# Altium PCB Board1.PcbDoc
Units mm, origin at the board's own origin, x right, y up, seen from the top; angles counter-clockwise.
Board outline 72.77 x 57.02 mm, 2 copper layers (Top Layer, Bottom Layer); 33 components, 27 nets, 112 pads, 9 vias.
Unrouted connection lines stored in the file: 1.
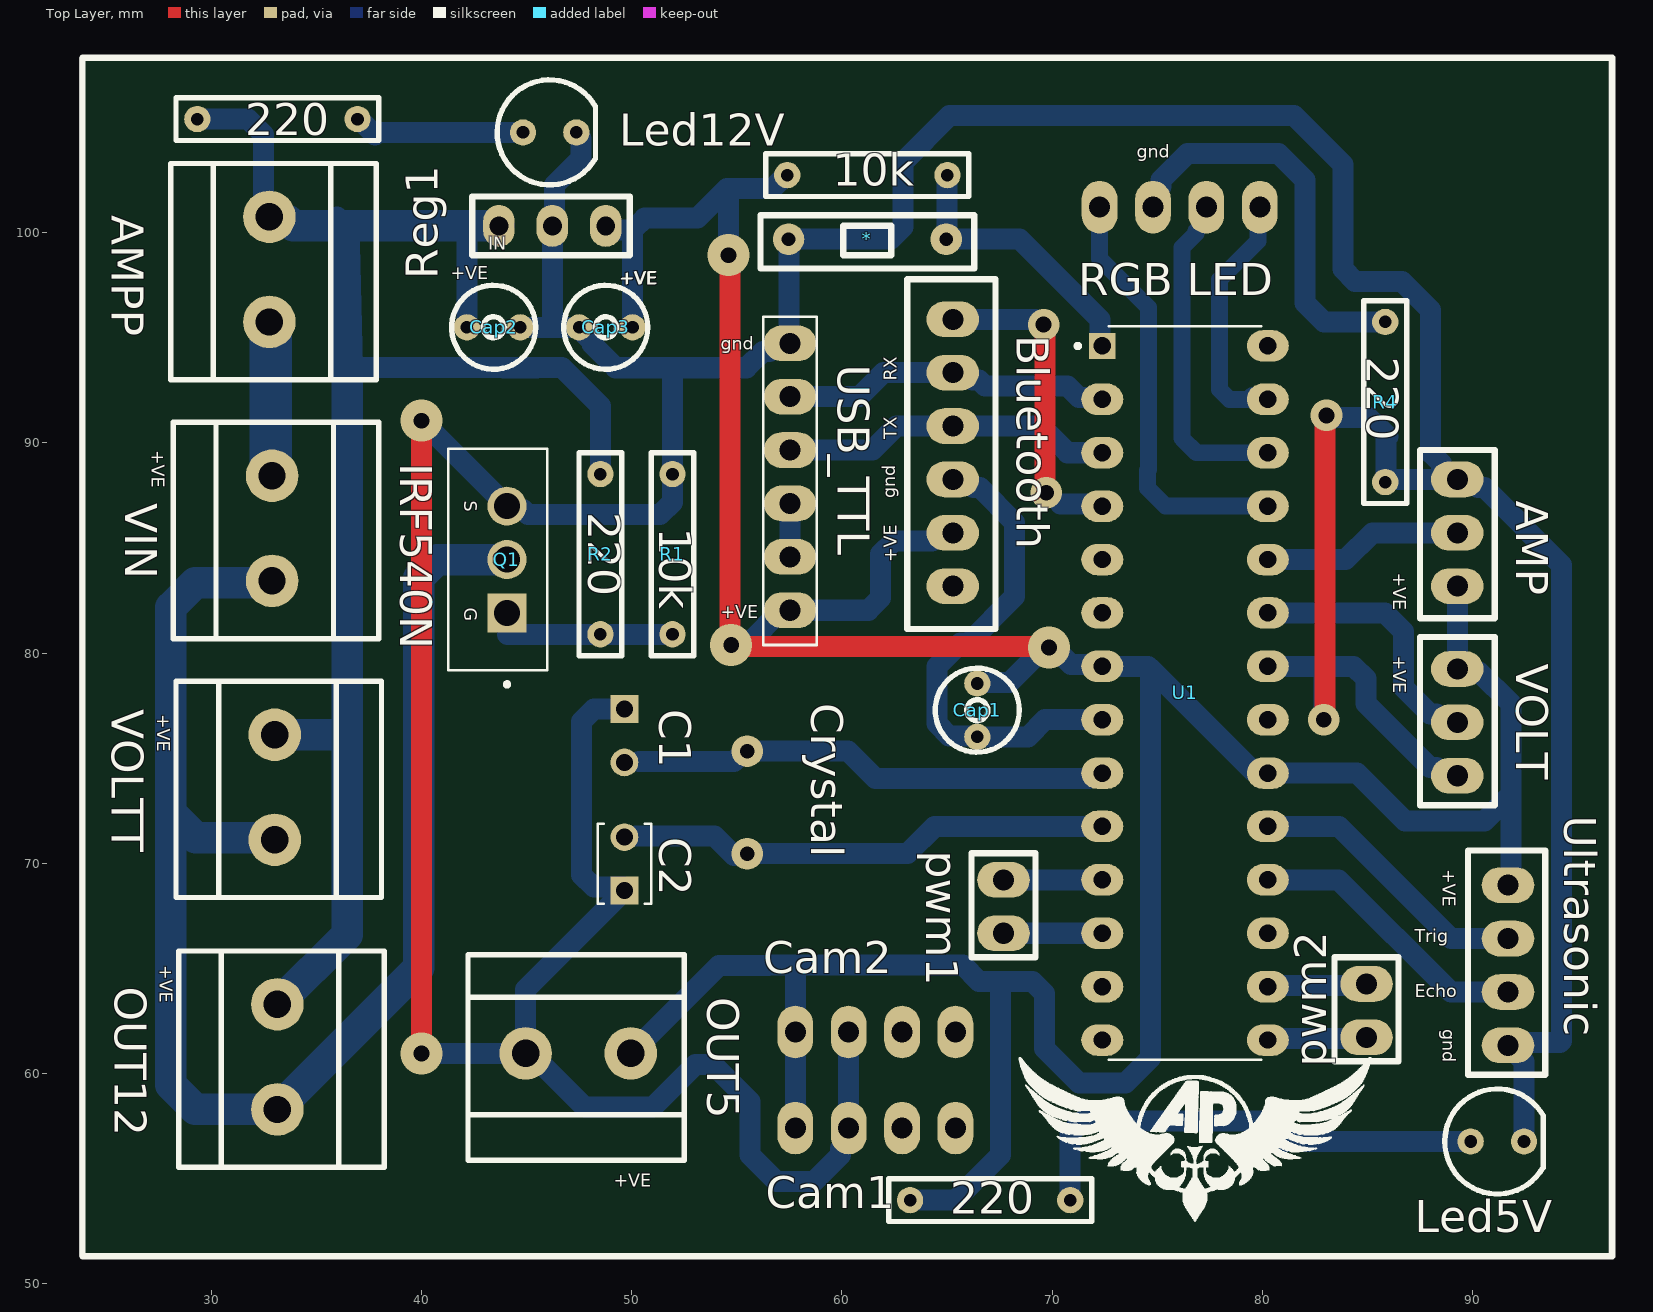
[diagram p0: Top Layer view]
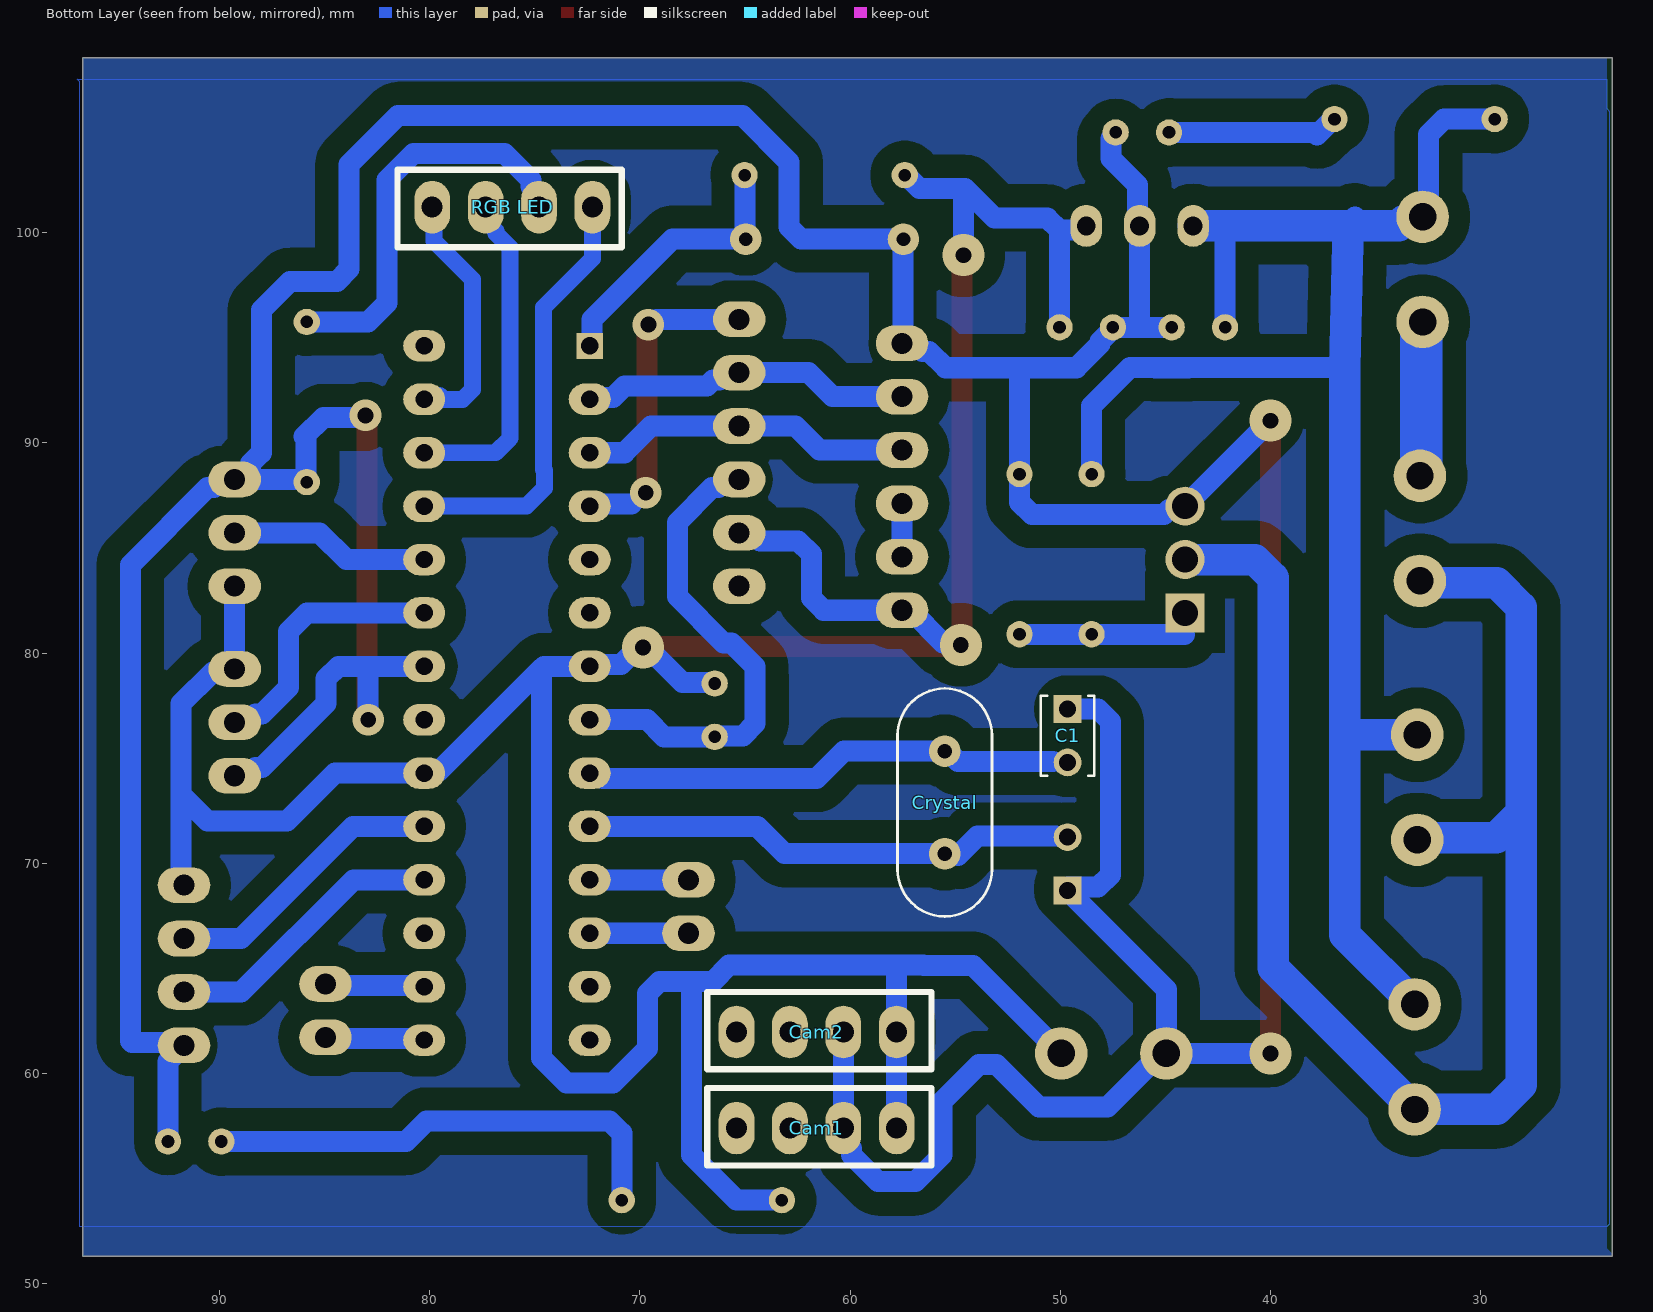
[diagram p1: Bottom Layer view, seen from below]
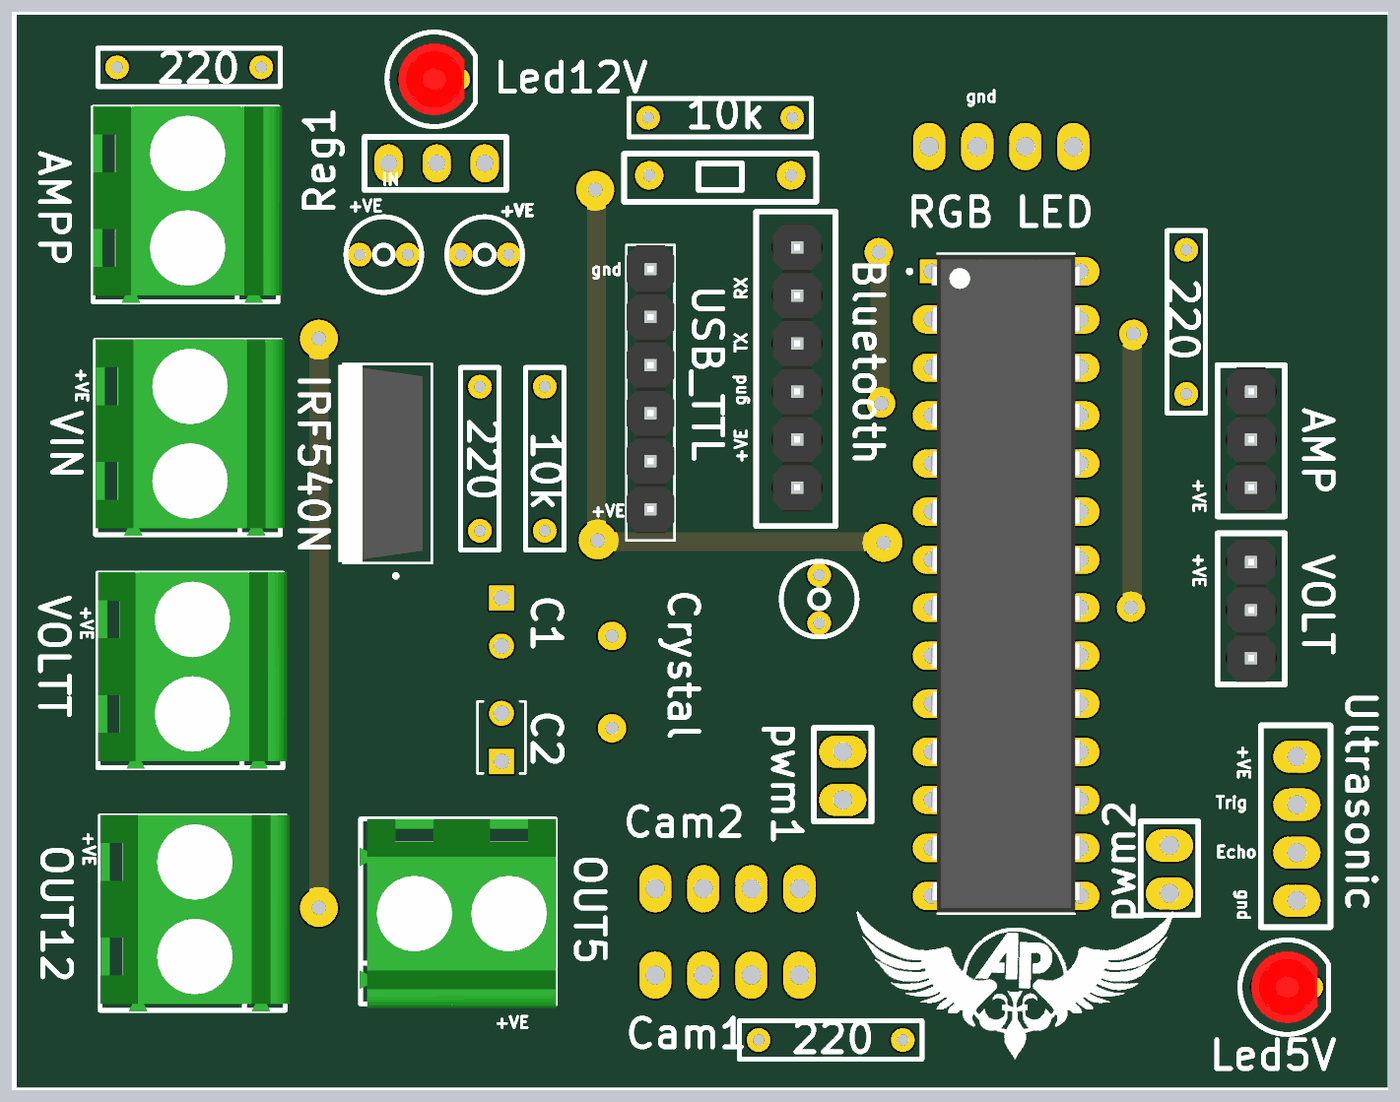
[diagram p2: 3D render of the assembled board from above, using the file's embedded part models]

## Layer stack, top to bottom
Top Solder: solder mask 0.0102, Solder Resist, Dk 3.5
Top Layer: signal copper 0.0356
Dielectric 1: dielectric 0.32, FR-4, Dk 4.8
Bottom Layer: signal copper 0.0356
Bottom Solder: solder mask 0.0102, Solder Resist, Dk 3.5

## Board outline
23.749,51.308 96.52,51.308 96.52,108.331 23.749,108.331

## Design rules (kind name [scope] priority, off if disabled: settings)
Clearance [All] p1: gap=0.8 ignorepadtopadclearanceinfootprint=FALSE except(1: THPad-Poly Via-Poly; 1.1: Track-Poly)
PlaneClearance [All] p1: clearance=0.504
PolygonConnect [All] p1: connectstyle=Relief reliefconductorwidth=0.254 reliefentries=4 polygonreliefangle="90 Angle" airgapwidth=0.254
RoutingVias [All] p1: holewidth=0.711 width=1.27 viastyle="Through Hole" minholewidth=0.711 minwidth=1.27 maxholewidth=0.711 maxwidth=1.27
SolderMaskExpansion [All] p1: expansion=0.102 istentingtop=FALSE
Width [All] p1: maxlimit=2 minlimit=0.8 preferedwidth=1
29 further rules are at their usual default settings.

## Components (designator, comment, footprint, x,y, rotation, side; value= is the part's Value field where it differs from the comment)
10k "Resistor" Resistor 61.214,102.743 r180 top
220 "220" Resistor 67.056,53.975 r180 top (schematic designator R5)
220 "220" Resistor 33.147,105.41 r180 top (schematic designator R3)
* "dipswitch" dipswitch 61.214,99.695 r0 top
AMP "Header 1x3" "pinheaders 3 pins" 89.281,88.265 r90 top
AMPP "Terminal Block" "Terminal Block" 32.766,100.758 r270 top
Bluetooth "Header 1x6" "pinheaders 6 pins" 65.278,88.265 r90 top (schematic designator USB_TTL?)
C1 "ceramic" "ceramic cap" 49.657,76.073 r270 bottom
C2 "ceramic" "ceramic cap" 49.657,69.977 r90 top
Cam1 "Header 1x4" "pinheaders 4 pins" 60.325,57.404 r180 bottom
Cam2 "2" "pinheaders 4 pins" 60.325,61.976 r180 bottom
Cap1 "Capacitor" Capacitor 66.445,77.288 r270 top
Cap2 "Capacitor" Capacitor 43.434,95.504 r0 top
Cap3 "Capacitor" Capacitor 48.768,95.504 r180 top
Crystal "Crystal" crystal 55.499,72.898 r270 bottom
Led5V "Led 5mm" LED 91.186,56.769 r0 top (schematic designator Led2)
Led12V "Led 5mm" LED 46.101,104.775 r0 top (schematic designator Led1)
OUT5 "Terminal Block" "Terminal Block" 49.958,60.96 r180 top
OUT12 "Terminal Block" "Terminal Block" 33.147,63.293 r270 top
pwm1 "Header 2x1" "pinheaders 2 pins" 67.691,69.215 r270 top (schematic designator PWM1)
pwm2 "Header 2x1" "pinheaders 2 pins" 84.963,64.262 r270 top (schematic designator PWM2)
Q1 "IRF540N" irf540n 44.069,81.915 r90 top
R1 "10k" Resistor 51.943,84.709 r90 top
R2 "220" Resistor 48.514,84.709 r270 top
R4 "220" Resistor 85.852,91.948 r90 top
Reg1 "Regulator" Regulator 46.228,100.33 r0 top
"RGB LED" "Header 1x4" "pinheaders 4 pins" 77.343,101.219 r0 bottom
U1 "ATMEGA328-PU" ATMEGA328PU 76.327,78.105 r0 top
Ultrasonic "Header 1x4" "pinheaders 4 pins" 91.694,66.421 r90 top
USB_TTL "Header 1x6" "pinheaders 6 pins" 57.531,87.122 r90 top
VIN "Terminal Block" "Terminal Block" 32.893,88.439 r270 top
VOLT "Header 1x3" "pinheaders 3 pins" 89.281,74.168 r270 top
VOLTT "Terminal Block" "Terminal Block" 33.02,76.12 r270 top

## Footprints (in the part's own frame and the unit in brackets; to place one, negate y for a bottom-side part, rotate by r counter-clockwise, add the part's x,y. Pads: shape width x height; smd on the part's side, far side on the other; paste and mask are expansions set on the pad)
ATMEGA328PU [mm]
  rect 1.25x1.25 / inner round 1.25 / far side rect 1.25x1.25 hole 0.83: 1(-3.937,16.51)
  oval 2x1.5 hole 0.83: 2(-3.937,13.97) 3(-3.937,11.43) 4(-3.937,8.89) 5(-3.937,6.35) 6(-3.937,3.81) 7(-3.937,1.27) 8(-3.937,-1.27) 9(-3.937,-3.81) 10(-3.937,-6.35) 11(-3.937,-8.89) 12(-3.937,-11.43) 13(-3.937,-13.97) 14(-3.937,-16.51) 15(3.937,-16.51) 16(3.937,-13.97) 17(3.937,-11.43) 18(3.937,-8.89) 19(3.937,-6.35) 20(3.937,-3.81) 21(3.937,-1.27) 22(3.937,1.27) 23(3.937,3.81) 24(3.937,6.35) 25(3.937,8.89) 26(3.937,11.43) 27(3.937,13.97) 28(3.937,16.51)
  silkscreen extent -5.2,-17.45 3.62,17.45, body extent -3.95,-17.34 3.95,17.34, height 4.57
Capacitor [mm]
  round 1.25 hole 0.6: anode(-1.27,0) cathode(1.27,0)
  silkscreen extent -2,-2 2,2
"ceramic cap" [mm]
  rect 1.318x1.318 / inner round 1.318 / far side rect 1.318x1.318 hole 0.81: 1(-1.27,0)
  round 1.318 hole 0.81: 2(1.27,0)
  silkscreen extent -1.91,-1.27 1.91,1.27
crystal [mm]
  round 1.5 hole 0.68: 1(-2.44,0) 2(2.44,0)
  silkscreen extent -5.43,-2.25 5.43,2.25
dipswitch [mm]
  round 1.5 hole 0.65: 1(-3.75,0) 2(3.75,0)
  silkscreen extent -5.08,-1.4 5.08,1.14
irf540n [mm]
  rect 1.85x1.85 / inner round 1.85 / far side rect 1.85x1.85 hole 1.23: 1(0,0)
  round 1.85 hole 1.23: 2(2.54,0) 3(5.08,0)
  silkscreen extent -3.5,-1.91 7.81,2.79, body extent -2.67,-1.41 7.75,3.04, height 19.3
LED [mm]
  round 1.25 hole 0.6: anode(-1.27,0) cathode(1.27,0)
  silkscreen extent -2.5,-2.5 2.18,2.5, body extent -1.9,-1.9 1.6,1.9, height 6.5
"pinheaders 2 pins" [mm] "2.54mm"
  oval 1.7x2.5 hole 1: 1(0,0) 2(2.54,0)
"pinheaders 3 pins" [mm] "2.54mm"
  oval 1.7x2.5 hole 1: 1(-5.08,0) 2(-2.54,0) 3(0,0)
  silkscreen extent -6.6,-1.78 1.4,1.78, body extent -6.35,-1.27 1.27,1.27, height 8.6
"pinheaders 4 pins" [mm]
  oval 1.7x2.5 hole 1: 1(-5.08,0) 2(-2.54,0) 3(0,0) 4(2.54,0)
  silkscreen extent -6.48,-1.78 4.19,1.91
"pinheaders 6 pins" [mm] "2.54mm"
  oval 1.7x2.5 hole 1: 1(-5.08,0) 2(-2.54,0) 3(0,0) 4(2.54,0) 5(5.08,0) 6(7.62,0)
  silkscreen extent -7.11,-2.03 9.53,2.16, body extent -6.35,-1.27 8.89,1.27, height 8.6
Regulator [mm]
  oval 1.5x2 hole 0.9: gnd(0,0) in(-2.54,0) out(2.54,0)
  silkscreen extent -3.81,-1.4 3.68,1.4
Resistor [mm]
  round 1.25 hole 0.6: 1(-3.81,0) 2(3.81,0)
  silkscreen extent -4.83,-1.02 4.83,1.02, body extent -4.09,-1.15 4.09,1.15, height 2.44
"Terminal Block" [mm]
  round 2.5 hole 1.3: 1(0,0) 2(5,0)
  silkscreen extent -2.54,-4.7 7.75,5.08, body extent -2.6,-4.7 7.8,5.3, height 12.95

## Part data
220 220 R1 R2 R4: library part Resistor
C1 C2: library part "ceramic cap"
Cam2: library part "Header 1x4"
Crystal: "8MHz Â±30ppm Crystal 20pF 60 Ohms HC-49/US", Package="HC-49/US CTS-Frequency Controls", Availability=Good, Check_prices=https://www.snapeda.com/parts/ATS08A-E/CTS-Frequency%20Controls/view-part/2457201/?ref=eda, MF="CTS-Frequency Controls", MP=ATS08A-E, Price=None, Purchase-URL=https://pricing.snapeda.com/search/part/ATS08A-E/?ref=eda, SnapEDA_Link=https://www.snapeda.com/parts/ATS08A-E/CTS-Frequency%20Controls/view-part/2457201/?ref=snap
Q1: library part IRF540NPBF, "RoHS Compliant", Package="TO-220 Infineon", Availability="In Stock", Check_prices=https://www.snapeda.com/parts/IRF540NPBF/Infineon+Technologies/view-part/?ref=eda, MF=Infineon, MP=IRF540NPBF, Price=None, Purchase-URL=https://pricing.snapeda.com/search/part/IRF540NPBF/?ref=eda, SnapEDA_Link=https://www.snapeda.com/parts/IRF540NPBF/Infineon+Technologies/view-part/?ref=snap
U1: "AVR AVRÂ® ATmega Microcontroller IC 8-Bit 20MHz 32KB (16K x 16) FLASH 28-PDIP", Package="DIP-28 Microchip Technology", Availability="In Stock", Check_prices=https://www.snapeda.com/parts/ATMEGA328-PU/Microchip/view-part/?ref=eda, MF=Microchip, MP=ATMEGA328-PU, Price=None, Purchase-URL=https://pricing.snapeda.com/search/part/ATMEGA328-PU/?ref=eda, SnapEDA_Link=https://www.snapeda.com/parts/ATMEGA328-PU/Microchip/view-part/?ref=snap

## Via types
v1: diameter 2, hole 0.75, Top Layer to Bottom Layer, 5 vias
v2: diameter 1.5, hole 0.75, Top Layer to Bottom Layer, 4 vias

## Nets (pads, with @x,y where several pads share a name; then routed paths per layer and width w, separated by ;. In a path a pad name is that pad's centre, name@x,y a point inside that pad or via, vN(x,y) a via of type N, cw(c..) or ccw(c..) an arc to the next point about the centre after c; other vN are vias at no path point)
+5: 10k.2 220.2@63.246,53.975 AMP.1 Bluetooth.2 Cam1.4 Cam2.4 Cap1.anode Cap3.anode OUT5.1 Reg1.out U1.7 U1.20 Ultrasonic.4 USB_TTL.1 VOLT.1 | length 180.6
  Top Layer w1: v1(54.61,98.933) 54.673,98.87 54.673,80.454 54.8,80.328 69.787,80.328 v1(69.85,80.264)
  Bottom Layer w1: Reg1.out 48.973,100.125 50.038,100.125 ; OUT5.1 54.149,65.151 56.503,65.151 56.513,65.161 57.912,65.161 ; Cap3.anode 50.038,100.125 ; v1(54.61,98.933) 54.61,102.03 54.532,102.108 ; v1@55.585,80.487 USB_TTL.1@57.14,82.042 ; 10k.2 57.336,102.743 56.701,102.108 54.532,102.108 ; USB_TTL.1 61.263,82.042 61.849,82.628 61.849,84.709 62.475,85.335 64.299,85.335 64.689,85.725 Bluetooth.2 ; Cam1.4 Cam2.4 57.785,65.034 57.912,65.161 ; 220.2@63.246,53.975 65.417,53.975 67.555,56.113 67.555,64.271 67.437,64.389 ; Cap1.anode 66.493,78.606 67.973,78.606 69.631,80.264 v1(69.85,80.264) 70.121,80.264 70.914,79.471 72.294,79.471 U1.7 74.575,79.375 74.69,79.26 ; AMP.1 VOLT.1 89.415,79.114 90.315,79.114 91.831,77.599 91.831,73.277 ; Ultrasonic.4 91.831,69.098 91.831,73.277 ; 50.038,100.125 50.624,100.711 53.135,100.711 54.532,102.108 ; 57.912,65.161 65.764,65.161 66.536,64.389 67.437,64.389 ; 67.437,64.389 69.061,64.389 69.647,63.803 69.647,61.189 71.291,59.545 73.489,59.545 74.69,60.746 74.69,79.26 ; 74.69,79.26 79.559,74.391 80.168,74.391 U1.20 84.52,74.295 86.797,72.018 90.572,72.018 91.831,73.277
  other v1: 54.737,80.391
+12: 220.2@29.337,105.41 AMPP.1 Cap2.anode OUT12.1 R2.1 Reg1.in VOLTT.1 | length 82.1
  Bottom Layer w1: 220.2@29.337,105.41 31.75,105.41 32.479,104.681 32.479,101.045 AMPP.1 ; 35.99,100.758 36.334,100.34 ; 36.461,93.599 43.887,93.599 43.907,93.579 45.501,93.579 45.521,93.599 46.675,93.599 48.514,91.76 R2.1 ; Cap2.anode 42.164,100.584
  Bottom Layer w1.5: AMPP.1 32.957,100.567 33.664,100.567 33.901,100.33 35.99,100.33 42.164,100.33 Reg1.in ; VOLTT.1 36.461,76.12 ; OUT12.1 36.461,66.607 36.461,76.12 ; 36.334,100.34 36.334,99.441 36.461,93.599 36.461,76.12
GND: *.1 AMP.3 Bluetooth.3 C1.1 C2.1 Cam1.3 Cam2.3 Cap1.cathode Cap2.cathode Cap3.cathode Led5V.cathode Led12V.cathode OUT5.2 Q1.3 R1.2 R4.1 Reg1.gnd U1.8 U1.22 Ultrasonic.1 USB_TTL.6 VOLT.3 | length 281.5
  Top Layer w1: v1(40.005,60.96) v1(40.005,91.059) ; v2(82.931,76.835) 82.995,76.898 82.995,91.249 v2(83.058,91.313)
  Bottom Layer w1: v1(40.005,60.96) OUT5.2 ; v1(40.005,91.059) Q1.3 44.232,86.832 44.833,86.832 45.071,86.594 51.357,86.594 51.943,87.18 R1.2 51.943,93.579 ; Cap2.cathode 46.101,95.504 ; Led12V.cathode 47.371,104.707 47.599,104.479 47.599,103.542 46.324,102.266 46.324,100.426 Reg1.gnd 46.228,95.631 46.101,95.504 ; C2.1 44.958,64.008 OUT5.2 ; C2.1@49.657,68.866 48.211,68.866 47.625,69.452 47.625,76.757 48.211,77.343 C1.1 ; Cam2.3 Cam1.3 60.325,56.815 59.935,56.425 59.935,56.113 58.676,54.854 56.894,54.854 55.635,56.113 55.635,58.665 53.866,60.434 53.038,60.434 51.014,58.41 47.762,58.41 45.212,60.96 OUT5.2 ; Bluetooth.3 65.867,88.265 66.257,87.875 66.569,87.875 68.219,86.225 68.219,82.685 66.016,80.483 65.648,80.483 64.52,79.355 64.52,78.986 64.516,78.982 64.516,76.659 65.109,76.066 66.397,76.066 Cap1.cathode 68.85,76.018 69.667,76.835 U1.8 ; U1.22 82.804,79.375 ; v2(82.931,76.835) 82.931,79.248 82.804,79.375 ; v2(83.058,91.313) 83.154,91.217 85.059,91.217 85.979,90.297 85.9,90.218 R4.1@85.9,88.186 ; R4.1@86.047,88.265 AMP.3@89.07,88.265 ; VOLT.3 88.692,74.168 88.302,74.558 87.996,74.558 87.985,74.558 84.931,77.612 84.931,78.789 84.345,79.375 82.804,79.375 ; Ultrasonic.1 91.905,61.341 92.228,61.018 92.228,60.807 92.456,60.579 Led5V.cathode ; Ultrasonic.1@91.828,61.475 94.173,61.475 94.244,61.546 94.244,84.203 90.572,87.875 90.26,87.875 89.87,88.265 AMP.3 AMP.3@89.07,88.265 ; 46.101,95.504 Cap3.cathode 47.498,95.436 48.113,94.821 48.113,94.707 49.241,93.579 51.943,93.579 ; 51.943,93.579 55.467,93.579 56.24,94.352 56.552,94.352 56.942,94.742 USB_TTL.6 57.497,94.776 57.497,99.695 62.328,99.695 62.914,100.281 62.914,103.355 65.128,105.569 81.519,105.569 83.833,103.255 83.833,98.269 84.419,97.683 86.649,97.683 88.011,96.321 88.011,89.535 88.531,89.015 88.531,88.804 AMP.3@89.07,88.265
Net10k_1: 10k.1 *.2 U1.1 | length 13.3
  Bottom Layer w1: 10k.1@65.058,102.777 10k.1 64.994,102.713 64.994,99.695 68.453,99.695 72.276,95.872 72.276,94.729 U1.1
NetAMP_2: AMP.2 U1.24 | length 9.5
  Bottom Layer w1: U1.24 83.968,84.455 85.238,85.725 AMP.2
NetAMPP_2: AMPP.2 VIN.1 | length 6.7
  Bottom Layer w1: AMPP.2@32.766,95.123 AMPP.2@32.829,95.059 ; VIN.1@32.829,88.503 VIN.1
  Bottom Layer w2: VIN.1@32.829,88.503 AMPP.2@32.829,95.059
NetC1_2: C1.2 Crystal.1 U1.9 | length 23
  Top Layer w1: Crystal.1 Crystal.1@55.634,75.338
  Bottom Layer w1: 50.339,74.85 54.876,74.85 55.364,75.338 Crystal.1 60.298,75.338 61.595,74.041 71.751,74.041 72.005,74.295 U1.9
NetC2_2: C2.2 Crystal.2 U1.10 | length 22.6
  Top Layer w1: Crystal.2 Crystal.2@55.634,70.458
  Bottom Layer w1: C2.2@50.212,71.294 53.947,71.294 Crystal.2@54.863,70.378 ; Crystal.2 63.123,70.458 64.42,71.755 U1.10
NetLed1_anode: 220.1@36.957,105.41 Led12V.anode | length 8.3
  Bottom Layer w1: 220.1@36.957,105.41 37.025,105.41 37.787,104.648 37.914,104.775 Led12V.anode ; Led12V.anode@44.742,104.796 Led12V.anode@44.81,104.796
NetLed2_anode: 220.1@70.866,53.975 Led5V.anode | length 22.9
  Bottom Layer w1: 220.1@70.866,53.975 70.866,57.159 71.452,57.745 80.162,57.745 81.138,56.769 Led5V.anode
NetOUT12_2: OUT12.2 Q1.2 VIN.2 VOLTT.2 | length 71.7
  Bottom Layer w1.5: VIN.2@32.797,83.343 29.239,83.343 28.067,82.172 28.067,72.419 ; VOLTT.2@32.924,71.216 29.27,71.216 28.067,72.419 ; Q1.2 40.757,84.455 39.878,83.576 39.878,65.024 OUT12.2 29.239,58.293 28.067,59.465 28.067,72.419
  Bottom Layer w2: VIN.2@32.797,83.343 VIN.2 ; VOLTT.2@32.924,71.216 VOLTT.2
Netpwm1_1: pwm1.1 U1.11 | length 4.7
  Bottom Layer w1: pwm1.1 U1.11
Netpwm1_2: pwm1.2 U1.12 | length 4.8
  Bottom Layer w1: pwm1.2@67.627,66.611 pwm1.2 U1.12
Netpwm2_1: pwm2.1 U1.16 | length 4.8
  Bottom Layer w1: U1.16 80.328,64.198 84.9,64.198 pwm2.1
Netpwm2_2: pwm2.2 U1.15 | length 4.8
  Bottom Layer w1: U1.15 80.328,61.658 84.9,61.658 pwm2.2
NetQ1_1: Q1.1 R1.1 R2.2 | length 7.7
  Bottom Layer w1: 44.102,80.899 R2.2 R1.1@51.816,80.899
NetR4_2: "RGB LED.2" R4.2 | length 19.4
  Bottom Layer w1: 74.803,101.219 74.803,101.808 75.193,102.198 75.193,102.51 76.452,103.769 80.774,103.769 82.033,102.51 82.033,96.656 82.931,95.758 R4.2
"NetRGB LED_1": "RGB LED.1" U1.25 | length 20.4
  Bottom Layer w0.8: 72.263,101.219 72.263,98.769 74.59,96.442 74.59,89.558 74.59,88.727 74.549,88.686 74.549,87.849 75.403,86.995 U1.25
"NetRGB LED_3": "RGB LED.3" U1.26 | length 15.8
  Bottom Layer w0.8: 77.343,101.219 77.343,100.575 76.853,100.085 76.853,99.97 76.19,99.307 76.19,90.221 76.876,89.535 U1.26
"NetRGB LED_4": "RGB LED.4" U1.27 | length 13.1
  Bottom Layer w0.8: 79.883,101.219 79.795,101.131 79.795,99.607 77.964,97.776 77.964,92.544 78.433,92.075 U1.27
  Bottom Layer w1: U1.27@79.559,92.171 80.168,92.171 U1.27 U1.27@80.649,92.075
NetU1_2: Bluetooth.5 U1.2 USB_TTL.5 | length 15.9
  Bottom Layer w1: USB_TTL.5@57.404,92.075 USB_TTL.5@57.468,92.138 ; USB_TTL.5 60.833,92.202 61.976,93.345 65.867,93.345 66.217,92.995 66.523,92.995 66.808,92.71 70.739,92.71 71.278,92.171 72.294,92.171 U1.2
NetU1_3: Bluetooth.4 U1.3 USB_TTL.4 | length 15.9
  Bottom Layer w1: USB_TTL.4 61.468,89.662 62.611,90.805 69.469,90.805 70.739,89.535 U1.3
NetU1_4: Bluetooth.6 U1.4 | length 14.5
  Top Layer w1: v2(69.596,95.631) 69.659,95.567 69.659,87.694 v2(69.723,87.63)
  Bottom Layer w1: Bluetooth.6 69.207,95.885 69.461,95.631 v2(69.596,95.631) ; 70.398,87.091 72.294,87.091 U1.4
NetU1_18: U1.18 Ultrasonic.2 | length 13.6
  Bottom Layer w1: U1.18 83.639,69.215 88.973,63.881 Ultrasonic.2
NetU1_19: U1.19 Ultrasonic.3 | length 13.6
  Bottom Layer w1: U1.19 83.644,71.755 88.978,66.421 Ultrasonic.3
NetU1_23: U1.23 VOLT.2 | length 12.7
  Bottom Layer w1: U1.23 85.852,81.915 86.731,81.036 86.731,78.357 87.99,77.098 88.302,77.098 88.692,76.708 VOLT.2
NetUSB_TTL_2: USB_TTL.2 USB_TTL.3 | length 2.5
  Bottom Layer w1: USB_TTL.2 USB_TTL.3
pads on no net: Bluetooth.1 Cam1.1 Cam1.2 Cam2.1 Cam2.2 U1.5 U1.6 U1.13 U1.14 U1.17 U1.21 U1.28

## Polygon pours and split planes (outlines as drawn)
GND on Bottom Layer "GND_L02_P002" (solid, pour order 2): 24.003,108.331 24.003,51.689 23.622,51.308 96.52,51.308 96.52,108.331
no net on Bottom Layer "NONET_L02_P000" (solid, shelved, pour order 0): 23.876,52.832 24.003,52.705 96.647,52.705 96.647,107.188 96.774,107.315 24.003,107.315 24.003,105.918 23.876,105.791

## Silkscreen, mask and mechanical layers (free items; w line width, h text height)
Top Overlay:
  drawing of 20 lines, arcs and shapes, not listed
  text "gnd" at 74.041,103.578 h0.6
  text "IN" at 43.18,99.187 h0.6
  text "+VE" at 41.402,97.79 h0.6
  text "+VE" at 49.449,97.559 h0.6
  text "+VE" at 49.403,97.536 h0.6
  text "gnd" at 54.229,94.434 h0.6
  text "RX" at 62.611,92.964 h0.6 r90
  text "TX" at 62.611,90.17 h0.6 r90
  text "+VE" at 27.178,89.662 h0.6 r270
  text "gnd" at 62.538,87.376 h0.6 r90
  text "S" at 42.037,87.249 h0.6 r270
  text "+VE" at 62.611,84.328 h0.6 r90
  text "+VE" at 86.233,83.82 h0.6 r270
  text "G" at 42.037,82.169 h0.6 r270
  text "+VE" at 54.229,81.661 h0.6
  text "+VE" at 86.233,79.883 h0.6 r270
  text "+VE" at 27.432,77.089 h0.6 r270
  text "+VE" at 88.587,69.726 h0.6 r270
  text "Trig" at 87.249,66.24 h0.6
  text "+VE" at 27.559,65.151 h0.6 r270
  text "Echo" at 87.249,63.627 h0.6
  text "gnd" at 88.592,62.103 h0.6 r270
  text "+VE" at 49.149,54.61 h0.6